# Altium PCB RFSOC_SAWG_Mezzanine.PcbDoc (part 2 of 2)
Units mm, origin at the board's own origin, x right, y up, seen from the top; angles counter-clockwise.
Board outline 64.4 x 72.39 mm, 4 copper layers (Top Layer, Layer 1, Layer 2, Bottom Layer), stack 1.429 mm thick; 92 components, 68 nets, 314 pads, 245 vias.
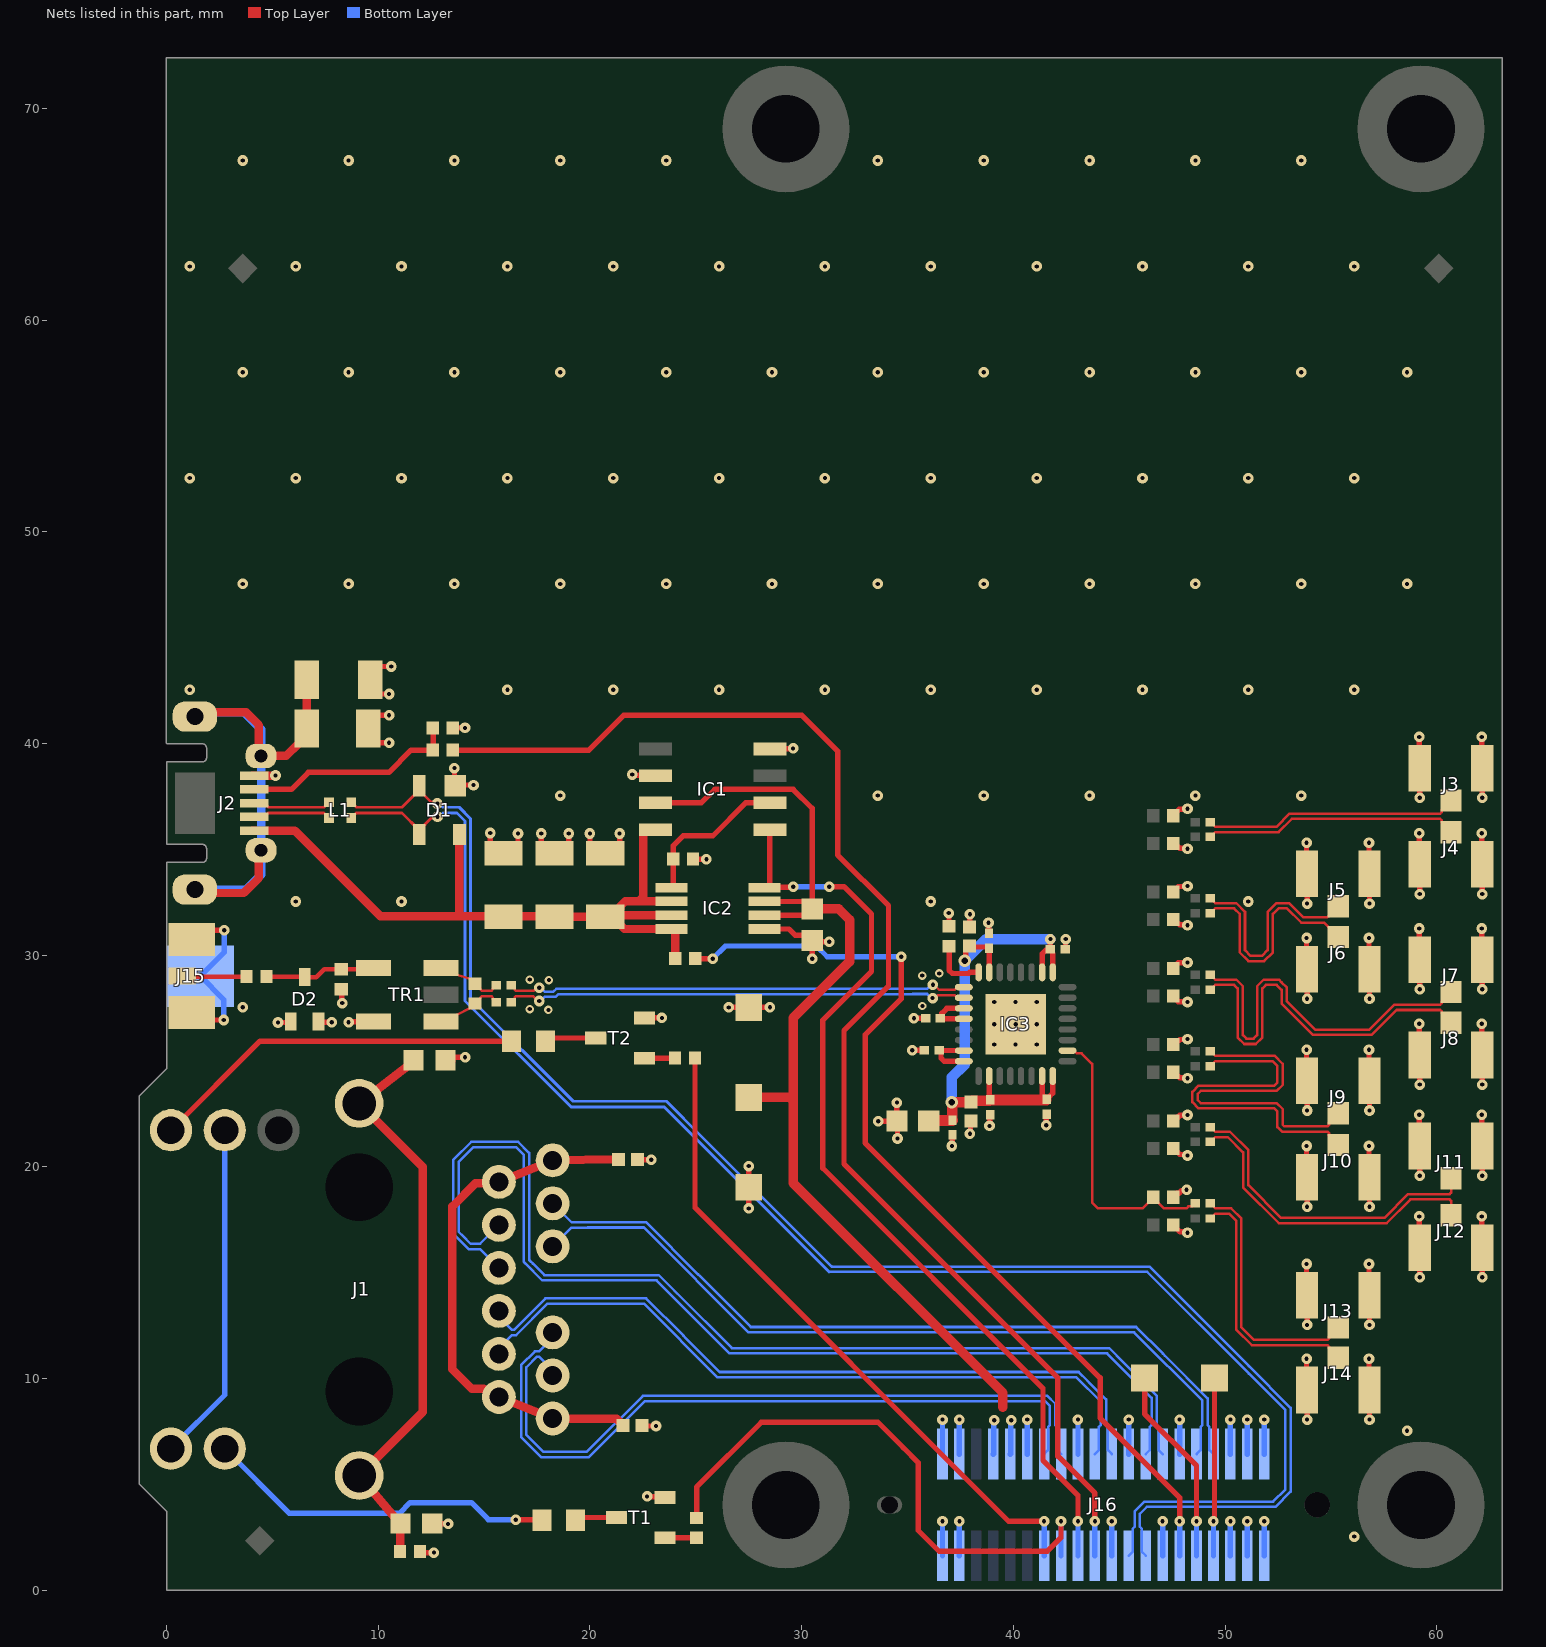
[diagram p4: the nets of this part, all layers, seen from the top]

## Via types
v1: diameter 0.5, hole 0.2, Top Layer to Bottom Layer, tented both sides, 227 vias
v2: diameter 0.4, hole 0.2, Top Layer to Bottom Layer, 9 vias
v3: diameter 0.4, hole 0.2, Top Layer to Bottom Layer, tented both sides, 7 vias
v4: diameter 0.6, hole 0.3, Top Layer to Bottom Layer, tented both sides, 2 vias

## Nets (pads, with @x,y where several pads share a name; then routed paths per layer and width w, separated by ;. In a path a pad name is that pad's centre, name@x,y a point inside that pad or via, vN(x,y) a via of type N, cw(c..) or ccw(c..) an arc to the next point about the centre after c; other vN are vias at no path point) (continued)
BUF_OUT5_P: C22.1 IC3.18 R22.1 | length 13.4
  Top Layer w0.12: IC3.18@42.56,25.488 42.87,25.488 42.995,25.363 43.229,25.363 43.725,24.867 43.725,21.085 43.725,18.31 43.999,18.036 46.104,18.036 46.402,18.334 R22.1@46.61,18.334 ; R22.1@46.61,18.562 46.61,18.542 47.116,18.036 48.17,18.036 48.269,18.135 48.462,18.135 C22.1@48.602,18.275
BUF_OUTC0_N: C11.2 J4.1 | length 12.1
  Top Layer w0.12: C11.2@49.302,35.583 49.327,35.583 49.467,35.723 49.467,35.739 49.537,35.809 52.524,35.809 53.15,36.435 60.165,36.435 60.235,36.365 60.235,36.25 J4.1@60.675,35.81
BUF_OUTC0_P: C10.2 J3.1 | length 12.1
  Top Layer w0.12: C10.2@49.302,36.285 49.327,36.285 49.467,36.145 49.467,36.129 49.537,36.059 52.421,36.059 53.046,36.685 60.165,36.685 60.235,36.755 60.235,36.87 J3.1@60.675,37.31
BUF_OUTC1_N: C14.2 J6.1 | length 10.9
  Top Layer w0.12: C14.2@49.302,31.985 49.327,31.985 49.467,32.125 49.467,32.141 49.537,32.211 50.041,32.211 50.425,32.211 50.693,31.944 50.693,30.133 51.107,29.719 51.849,29.719 52.263,30.133 52.263,31.944 52.53,32.211 52.664,32.211 52.924,32.211 53.6,31.535 54.675,31.535 54.885,31.325 54.91,31.325 55.35,30.885 J6.1@55.35,30.86
BUF_OUTC1_P: C12.2 J5.1 | length 10.8
  Top Layer w0.12: C12.2@49.302,32.687 49.327,32.687 49.467,32.547 49.467,32.532 49.537,32.461 50.041,32.461 50.529,32.461 50.943,32.047 50.943,30.236 51.21,29.969 51.745,29.969 52.013,30.236 52.013,32.047 52.427,32.461 52.664,32.461 53.027,32.461 53.704,31.785 54.745,31.785 54.825,31.785 54.885,31.845 54.91,31.845 55.35,32.285 J5.1@55.35,32.31
BUF_OUTC2_N: C16.2 J8.1 | length 18.6
  Top Layer w0.12: C16.2@49.302,28.36 49.327,28.36 49.467,28.5 49.467,28.524 49.537,28.594 50.11,28.594 50.426,28.594 50.593,28.427 50.593,26.118 50.907,25.804 51.449,25.804 51.763,26.118 51.763,28.427 51.931,28.594 52.064,28.594 52.441,28.594 52.673,28.362 52.673,27.708 54.146,26.235 56.925,26.235 58.1,27.41 59.513,27.41 60.165,27.41 60.235,27.34 60.235,27.25 J8.1@60.675,26.81
BUF_OUTC2_P: C15.2 J7.1 | length 18.6
  Top Layer w0.12: C15.2@49.302,29.079 49.327,29.079 49.467,28.939 49.467,28.915 49.537,28.844 50.11,28.844 50.529,28.844 50.843,28.531 50.843,26.221 51.011,26.054 51.346,26.054 51.513,26.221 51.513,28.531 51.827,28.844 52.064,28.844 52.544,28.844 52.677,28.712 52.923,28.465 52.923,27.812 53.112,27.623 53.2,27.535 54.25,26.485 56.821,26.485 57.996,27.66 59.409,27.66 60.165,27.66 60.235,27.73 60.235,27.82 J7.1@60.675,28.26
BUF_OUTC3_N: C18.2 J10.1 | length 17.1
  Top Layer w0.12: C18.2@49.302,24.76 49.327,24.76 49.467,24.9 49.467,24.919 49.537,24.99 52.245,24.99 52.475,24.76 52.475,24.647 52.475,23.978 52.333,23.835 48.748,23.835 48.459,23.546 48.459,23.054 48.748,22.765 52.333,22.765 52.475,22.623 52.475,22.489 52.475,21.877 52.692,21.66 54.525,21.66 54.84,21.66 54.91,21.59 54.91,21.475 J10.1@55.35,21.035
BUF_OUTC3_P: C17.2 J9.1 | length 17.1
  Top Layer w0.12: C17.2@49.302,25.469 49.327,25.469 49.467,25.329 49.467,25.31 49.537,25.24 52.349,25.24 52.725,24.864 52.725,24.647 52.725,23.874 52.436,23.585 48.851,23.585 48.709,23.443 48.709,23.158 48.851,23.015 52.436,23.015 52.725,22.726 52.725,22.489 52.725,21.98 52.795,21.91 54.421,21.91 54.84,21.91 54.91,21.98 54.91,22.095 J9.1@55.35,22.535
BUF_OUTC4_N: C21.2 J12.1 | length 15.3
  Top Layer w0.12: C21.2@49.302,21.185 49.327,21.185 49.467,21.325 49.467,21.337 49.537,21.407 50.128,21.407 50.85,20.685 50.85,19.031 52.546,17.335 57.629,17.335 58.754,18.46 60.605,18.46 60.675,18.39 J12.1@60.675,17.71
BUF_OUTC4_P: C20.2 J11.1 | length 15.3
  Top Layer w0.12: C20.2@49.302,21.88 49.327,21.88 49.467,21.74 49.467,21.728 49.537,21.657 50.231,21.657 51.1,20.789 51.1,19.135 52.65,17.585 57.525,17.585 58.65,18.71 60.605,18.71 60.675,18.78 J11.1@60.675,19.46
BUF_OUTC5_N: C23.2 J14.1 | length 12
  Top Layer w0.12: C23.2@49.302,17.56 49.327,17.56 49.467,17.7 49.467,17.722 49.537,17.793 50.189,17.793 50.525,17.456 50.525,12.31 51.263,11.573 54.84,11.573 54.91,11.502 54.91,11.425 J14.1@55.35,10.985
BUF_OUTC5_P: C22.2 J13.1 | length 12
  Top Layer w0.12: C22.2@49.302,18.275 49.327,18.275 49.467,18.135 49.467,18.113 49.537,18.043 50.292,18.043 50.775,17.56 50.775,12.414 51.366,11.823 54.84,11.823 54.91,11.893 54.91,11.97 J13.1@55.35,12.41
CLK_SEL: IC3.32 R11.2 | length 2.6
  Top Layer w0.254: R11.2@36.967,30.421 36.967,29.284 37.116,29.135 37.888,29.135 37.941,29.188 IC3.32@38.36,29.188
ETH_LED1: R3.1 T2.3 | length 2.4
  Top Layer w0.254: R3.1@17.9,25.935 18.05,26.085 T2.3@20.275,26.085
ETH_LED2: R1.1 T1.3 | length 2
  Top Layer w0.254: R1.1@19.325,3.31 19.45,3.435 T1.3@21.25,3.435
EXT_CLK0: D2.3 R24.2 R25.1 TR1.6 | length 5.2
  Top Layer w0.22: R24.2@4.72,28.985 6.5,28.985 D2.3@6.525,28.96 7.075,28.96 7.445,29.33 R25.1@8.25,29.33 9.705,29.33 TR1.6@9.775,29.4
EXT_CLK0_N: C32.2 IC3.2 | length 22
  Top Layer w0.12: C32.2@16.275,27.785 16.3,27.785 16.44,27.925 16.44,27.99 16.51,28.06 17.305,28.06 17.53,27.835 v1(17.6,27.835) ; v1(36.184,27.972) 36.287,27.972 36.428,28.113 37.055,28.113 37.225,28.113 37.35,27.988 IC3.2@37.66,27.988
  Bottom Layer w0.12: v1(17.6,27.835) 17.67,27.835 17.86,28.025 18.38,28.025 18.517,28.162 35.233,28.162 35.236,28.165 35.924,28.165 36.117,27.972 v1(36.184,27.972)
EXT_CLK0_P: C31.2 IC3.1 | length 22
  Top Layer w0.12: C31.2@16.275,28.585 16.3,28.585 16.44,28.445 16.44,28.38 16.51,28.31 17.342,28.31 17.497,28.465 v1(17.6,28.465) ; v1(36.201,28.602) 36.261,28.602 36.5,28.363 36.951,28.363 37.225,28.363 37.35,28.488 IC3.1@37.66,28.488
  Bottom Layer w0.12: v1(17.6,28.465) 17.67,28.465 17.86,28.275 18.277,28.275 18.414,28.412 35.129,28.412 35.132,28.415 35.941,28.415 36.128,28.602 v1(36.201,28.602)
EXT_CLKC0_N: C32.1 R26.2 TR1.3 | length 3.2
  Top Layer w0.12: TR1.3@12.955,26.86 13.72,27.18 14.325,27.485 R26.2@14.575,27.715 14.595,27.715 14.825,27.945 14.825,27.99 14.895,28.06 15.067,28.06 15.34,28.06 15.41,27.99 15.41,27.925 15.55,27.785 C32.1@15.575,27.785
EXT_CLKC0_P: C31.1 R26.1 TR1.1 | length 3.1
  Top Layer w0.12: TR1.1@12.955,29.4 13.72,29.08 14.325,28.885 R26.1@14.575,28.655 14.595,28.655 14.825,28.425 14.825,28.38 14.895,28.31 15.17,28.31 15.34,28.31 15.41,28.38 15.41,28.445 15.55,28.585 C31.1@15.575,28.585
FGND: C5.1 J2.6 R7.1 | length 28.8
  Top Layer w0.4: J2.6@1.24,33.094 1.399,32.935 3.65,32.935 4.365,33.65 J2.6@4.365,34.956 ; J2.6@1.24,41.269 1.441,41.469 3.766,41.469 4.365,40.87 4.365,39.595 J2.6@4.365,39.406 ; J2.6@4.368,39.409 5.649,39.409 6.25,40.01 6.625,40.385 C5.1@6.625,43.01
  Bottom Layer w0.4: J2.6@1.34,33.094 3.759,33.094 4.465,33.8 J2.6@4.465,34.956 J2.6@4.465,39.406 4.465,40.67 3.67,41.465 1.537,41.465 J2.6@1.34,41.269
GND: C1.2 C2.2 C3.1 C4.2 C5.2 C6.2 C7.2 C8.1 C9.1 C13.1 C19.1 C24.1 C25.1 C26.1 C27.1 C28.1 C29.1 C30.1 D1.1 D2.1 D2.2 IC1.4 IC1.6 IC2.1 IC3.33 J2.5 J3.2 J4.2 J5.2 J6.2 J7.2 J8.2 J9.2 J10.2 J11.2 J12.2 J13.2 J14.2 J15.2 J16.12 J16.13 J16.18 J16.19 J16.24 J16.30 J16.37 J16.38 J16.39 J16.40 R2.1 R7.2 R9.1 R11.1 R12.2 R13.2 R14.2 R15.2 R16.2 R17.2 R18.2 R19.2 R20.2 R21.2 R22.2 R23.2 R25.2 T1.2 T2.2 TP5.1 TR1.4 | length 135.7
  Top Layer w0.254: J15.2@1.196,27.284 1.545,26.935 v1(2.7,26.935) ; J15.2@1.196,30.734 1.637,31.175 v1(2.721,31.175) ; v1(5.266,26.82) 5.835,26.82 D2.1@5.875,26.86 ; D2.2@7.175,26.86 7.2,26.835 v1(7.8,26.835) ; R25.2@8.25,28.39 8.275,28.365 8.275,27.76 v1(8.3,27.735) ; v1(8.6,26.835) 8.613,26.848 9.763,26.848 TR1.4@9.775,26.86 ; R7.2@10,40.035 v1(10.512,40.035) ; R7.2@10,41.335 v1(10.512,41.335) ; C5.2@10,42.335 v1(10.512,42.335) ; C5.2@10.1,43.635 v1(10.612,43.635) ; R2.1@11.97,1.835 12.133,1.779 v1(12.631,1.779) ; C2.2@12.55,3.16 12.898,3.135 v1(13.3,3.135) ; C4.2@13.171,25.037 13.519,24.996 13.519,25.178 v1(14.102,25.178) ; R9.1@13.52,40.735 v1(14.1,40.735) ; v1(13.6,38.835) 13.6,38.035 D1.1@13.634,38.001 13.669,38.035 v1(14.5,38.035) ; v1(15.292,35.77) 15.292,35.258 15.74,34.81 C9.1@15.925,34.81 ; C9.1@16.6,35.235 v1(16.6,35.747) ; C7.2@17.7,35.235 v1(17.7,35.747) ; C7.2@19,35.235 v1(19,35.747) ; C8.1@20,35.135 v1@20,35.647 ; C8.1@21.4,35.135 v1@21.4,35.647 ; v1(22,38.535) 22.033,38.503 23.068,38.503 IC1.6@23.1,38.47 ; C3.1@22.242,20.346 22.425,20.335 v1(22.9,20.335) ; C1.2@22.465,7.791 22.648,7.757 v1(23.122,7.757) ; T2.2@22.575,27.035 v1(23.4,27.035) ; v1(22.7,4.435) 22.725,4.41 23.525,4.41 T1.2@23.55,4.385 ; v1(26.552,27.532) 27.497,27.532 TP5.1@27.5,27.535 v1(28.5,27.535) ; IC2.1@28.25,31.235 29.4,31.235 29.7,30.935 30.25,30.935 C6.2@30.5,30.685 ; IC1.4@28.5,39.74 28.513,39.753 29.584,39.753 v1(29.597,39.766) ; v1(30.5,29.835) C6.2@30.5,30.685 ; v1(31.3,30.635) 30.55,30.635 C6.2@30.5,30.685 ; v1(35.225,25.51) C19.1@35.8,25.51 ; v1(35.302,27.021) C13.1@35.852,27.021 ; v1(36.95,31.985) 36.959,31.976 36.959,31.37 R11.1@36.967,31.361 ; v1(37.1,20.985) 37.113,20.998 37.113,21.498 C25.1@37.125,21.51 ; C24.1@37.925,31.335 37.938,31.348 37.938,31.923 v1(37.95,31.935) ; v1(37.95,21.56) 37.975,21.585 37.975,22.135 C30.1@38,22.16 ; v1(38.825,31.535) 38.838,31.523 38.838,31.048 C26.1@38.85,31.035 ; v1(38.875,21.935) 38.888,21.948 38.888,22.448 C27.1@38.9,22.46 ; v1(41.55,21.96) 41.563,21.973 41.563,22.473 C28.1@41.575,22.485 ; C29.1@42.45,30.285 42.463,30.298 42.463,30.748 v1(42.475,30.76) ; R23.2@47.55,17.26 47.55,17.24 47.713,17.077 47.733,17.077 47.878,16.932 48.153,16.932 v1@48.2,16.885 ; R22.2@47.55,18.562 47.55,18.582 47.713,18.745 47.818,18.745 47.945,18.873 48.135,18.873 v1(48.182,18.92) ; R21.2@47.55,20.865 47.55,20.845 47.713,20.682 47.762,20.682 47.862,20.582 48.128,20.582 v1@48.175,20.535 ; R20.2@47.55,22.167 47.55,22.187 47.713,22.35 47.783,22.35 47.862,22.429 48.204,22.429 v1(48.225,22.45) ; R19.2@47.55,24.469 47.55,24.449 47.713,24.286 47.782,24.286 47.862,24.206 48.204,24.206 v1(48.225,24.185) ; R18.2@47.55,25.771 47.55,25.791 47.713,25.954 47.802,25.954 47.862,26.014 48.204,26.014 v1(48.225,26.035) ; R17.2@47.55,28.074 47.55,28.054 47.797,27.806 48.229,27.806 v1@48.25,27.785 ; R16.2@47.55,29.376 47.55,29.396 47.787,29.633 48.23,29.633 v1@48.251,29.654 ; R15.2@47.55,31.678 47.55,31.658 47.713,31.495 47.802,31.495 47.862,31.435 48.204,31.435 v1(48.225,31.414) ; R14.2@47.55,32.98 47.55,33 47.792,33.243 48.237,33.243 v1@48.258,33.264 ; R13.2@47.55,35.283 47.55,35.263 47.713,35.1 47.807,35.1 47.862,35.045 48.233,35.045 v1@48.254,35.024 ; R12.2@47.55,36.585 47.55,36.605 47.834,36.889 48.212,36.889 v1@48.233,36.91 ; v1(53.85,10.935) 53.85,9.485 J14.2@53.875,9.46 v1(53.875,8.06) ; v1(53.85,15.41) 53.85,13.96 J13.2@53.875,13.935 v1(53.875,12.535) ; v1(53.85,20.985) 53.85,19.535 J10.2@53.875,19.51 v1(53.875,18.11) ; v1(53.85,25.535) 53.85,24.085 J9.2@53.875,24.06 v1(53.875,22.66) ; v1(53.85,30.81) 53.85,29.36 J6.2@53.875,29.335 v1(53.875,27.935) ; v1(53.85,35.31) 53.85,33.86 J5.2@53.875,33.835 v1(53.875,32.435) ; v1(56.8,10.935) 56.8,9.485 J14.2@56.825,9.46 v1(56.825,8.06) ; v1(56.8,15.41) 56.8,13.96 J13.2@56.825,13.935 v1(56.825,12.535) ; v1(56.8,20.985) 56.8,19.535 J10.2@56.825,19.51 v1(56.825,18.11) ; v1(56.8,25.535) 56.8,24.085 J9.2@56.825,24.06 v1(56.825,22.66) ; v1(56.8,30.81) 56.8,29.36 J6.2@56.825,29.335 v1(56.825,27.935) ; v1(56.8,35.31) 56.8,33.86 J5.2@56.825,33.835 v1(56.825,32.435) ; v1(59.175,17.66) 59.175,16.21 J12.2@59.2,16.185 v1(59.2,14.785) ; v1(59.175,22.46) 59.175,21.01 J11.2@59.2,20.985 v1(59.2,19.585) ; v1(59.175,26.76) 59.175,25.31 J8.2@59.2,25.285 v1(59.2,23.885) ; v1(59.175,31.26) 59.175,29.81 J7.2@59.2,29.785 v1(59.2,28.385) ; v1(59.175,35.76) 59.175,34.31 J4.2@59.2,34.285 v1(59.2,32.885) ; v1(59.175,40.31) 59.175,38.86 J3.2@59.2,38.835 v1(59.2,37.435) ; v1(62.125,17.66) 62.125,16.21 J12.2@62.15,16.185 v1(62.15,14.785) ; v1(62.125,22.46) 62.125,21.01 J11.2@62.15,20.985 v1(62.15,19.585) ; v1(62.125,26.76) 62.125,25.31 J8.2@62.15,25.285 v1(62.15,23.885) ; v1(62.125,31.26) 62.125,29.81 J7.2@62.15,29.785 v1(62.15,28.385) ; v1(62.125,35.76) 62.125,34.31 J4.2@62.15,34.285 v1(62.15,32.885) ; v1(62.125,40.31) 62.125,38.86 J3.2@62.15,38.835 v1(62.15,37.435)
  Top Layer w0.4: J2.5@4.04,38.481 5.14,38.481 v1(5.146,38.487)
  Bottom Layer w0.254: v1(2.7,26.935) 2.7,27.905 J15.2@1.596,29.009 2.721,30.134 v1(2.721,31.175) ; J16.39@36.652,1.633 v1@36.652,3.259 ; J16.40@36.652,6.433 v1(36.652,8.06) ; J16.37@37.452,1.633 v1@37.452,3.259 ; J16.38@37.452,6.433 v1(37.452,8.06) ; J16.30@40.652,6.433 v1(40.652,8.06) ; J16.24@43.052,6.433 v1(43.052,8.06) ; J16.19@44.653,1.632 v1@44.652,3.259 ; J16.18@45.452,6.433 v1(45.452,8.06) ; J16.13@47.053,1.632 v1@47.052,3.259 ; J16.12@47.852,6.433 v1(47.852,8.06)
  other v1: 56.1,2.535 36.652,3.26 37.452,3.26 44.652,3.26 47.052,3.26 58.6,7.535 48.225,16.885 48.225,20.535 3.6,27.535 48.225,27.785 48.225,29.654 6.1,32.535 11.1,32.535 36.1,32.535 51.1,32.535 48.225,33.264 48.225,35.024 20,35.747 21.4,35.747 48.225,36.91 18.6,37.535 33.6,37.535 38.6,37.535 43.6,37.535 48.6,37.535 53.6,37.535 1.1,42.535 16.1,42.535 21.1,42.535 26.1,42.535 31.1,42.535 36.1,42.535 41.1,42.535 46.1,42.535 51.1,42.535 56.1,42.535 3.6,47.535 8.6,47.535 13.6,47.535 18.6,47.535 23.6,47.535 28.6,47.535 33.6,47.535 38.6,47.535 43.6,47.535 48.6,47.535 53.6,47.535 58.6,47.535 1.1,52.535 6.1,52.535 11.1,52.535 16.1,52.535 21.1,52.535 26.1,52.535 31.1,52.535 36.1,52.535 41.1,52.535 46.1,52.535 51.1,52.535 56.1,52.535 3.6,57.535 8.6,57.535 13.6,57.535 18.6,57.535 23.6,57.535 28.6,57.535 33.6,57.535 38.6,57.535 43.6,57.535 48.6,57.535 53.6,57.535 58.6,57.535 1.1,62.535 6.1,62.535 11.1,62.535 16.1,62.535 21.1,62.535 26.1,62.535 31.1,62.535 36.1,62.535 41.1,62.535 46.1,62.535 51.1,62.535 56.1,62.535 3.6,67.535 8.6,67.535 13.6,67.535 18.6,67.535 23.6,67.535 33.6,67.535 38.6,67.535 43.6,67.535 48.6,67.535 53.6,67.535
  other v2: 39.1,25.785 40.1,25.785 41.1,25.785 39.1,26.738 40.11,26.738 41.1,26.738 39.1,27.785 40.1,27.785 41.1,27.785
  other v3: 18.037,27.411 17.152,27.454 35.705,27.598 18.06,28.825 17.152,28.845 35.7,29.035 36.5,29.135
NetC1_1: C1.1 C3.2 J1.1 J1.6 J1.7 J1.12 | length 25.2
  Top Layer w0.4: J1.7@18.24,8.114 J1.1@15.7,9.13 15.375,9.13 14.983,9.522 14.413,9.522 13.5,10.435 13.5,18.135 14.588,19.223 15.633,19.223 J1.6@15.7,19.29 J1.12@18.24,20.306 21.24,20.35 C3.2@21.35,20.46 ; J1.7@18.264,8.09 21.266,8.09 C1.1@21.565,7.791
NetC2_1: C2.1 C4.1 J1.18 J1.19 R2.2 | length 27.7
  Top Layer w0.4: R2.2@11.03,1.835 11.032,1.945 11.032,2.885 C2.1@11.05,3.16 10.775,3.435 J1.18@9.1,5.42 12.1,8.42 12.1,20 J1.19@9.1,23 11.396,24.762 C4.1@11.671,25.037
NetC13_2: C13.2 IC3.3 IC3.4 | length 2.4
  Top Layer w0.254: C13.2@36.552,27.021 36.623,27.021 36.623,27.015 36.65,26.988 IC3.4@37.66,26.988 ; C13.2@36.623,27.137 36.623,27.253 36.858,27.488 IC3.3@37.66,27.488
NetC19_2: C19.2 IC3.7 IC3.8 | length 2.7
  Top Layer w0.254: C19.2@36.5,25.51 36.51,25.51 36.583,25.437 36.583,25.137 36.731,24.988 IC3.8@37.66,24.988 ; C19.2@36.538,25.497 37.651,25.497 IC3.7@37.66,25.488
NetJ1_13: J1.13 R1.2 | length 16.8
  Top Layer w0.254: v1(16.5,3.335) 17.7,3.335 R1.2@17.725,3.31
  Bottom Layer w0.254: J1.13@2.75,6.69 5.805,3.635 11,3.635 11.5,4.135 14.4,4.135 15.2,3.335 v1(16.5,3.335)
NetJ1_17: J1.17 R3.2 | length 17.9
  Top Layer w0.254: J1.17@0.21,21.73 4.415,25.935 15.977,25.935 R3.2@16.3,26.135
NetJ2_4: J2.4 R8.1 R9.2 | length 10.4
  Top Layer w0.254: J2.4@4.04,37.831 5.896,37.831 6.7,38.635 10.5,38.635 11.55,39.685 R8.1@12.58,39.685 12.605,39.71 12.605,40.71 R9.2@12.63,40.735
NetJ15_1: J15.1 R24.1 | length 3
  Top Layer w0.22: J15.1@0.746,29.009 0.77,28.985 R24.1@3.78,28.985
NetR4_2: R4.2 T1.1 | length 1.5
  Top Layer w0.254: T1.1@23.55,2.485 23.563,2.473 25.063,2.473 R4.2@25.075,2.46
NetR5_2: R5.2 T2.1 | length 1.5
  Top Layer w0.254: T2.1@22.575,25.135 23.904,25.135 cw(c23.904,24.964) R5.2@24.025,25.085
P3V3: J1.14 J1.16 J16.1 J16.2 J16.3 J16.4 J16.5 J16.6 L2.2 R10.1 TP3.1 | length 31.1
  Top Layer w0.254: R10.1@24.87,34.535 v1(25.5,34.535) ; v1(27.5,18.035) v1(27.5,20.035) ; v1(33.621,22.156) 34.496,22.156 L2.2@34.5,22.16 ; v1(34.5,23.035) L2.2@34.5,22.16 ; v1(34.526,21.339) 34.526,22.134 L2.2@34.5,22.16
  Bottom Layer w0.254: J1.14@0.21,6.69 2.75,9.23 J1.16@2.75,21.73 ; J16.5@50.253,1.632 v1@50.252,3.259 ; J16.6@50.252,6.433 v1(50.252,8.06) ; J16.3@51.053,1.632 v1@51.052,3.259 ; J16.4@51.052,6.433 v1@51.052,8.059 ; J16.1@51.853,1.632 v1@51.852,3.259 ; J16.2@51.852,6.433 v1@51.852,8.059
  other v1: 50.252,3.26 51.052,3.26 51.852,3.26 51.052,8.06 51.852,8.06
P3V3_ADCLK: C24.2 C25.2 C26.2 C27.2 C28.2 C29.2 C30.2 IC3.10 IC3.15 IC3.16 IC3.25 IC3.26 IC3.31 L2.1 | length 27.3
  Top Layer w0.254: v4(37.7,29.735) 37.747,29.782 37.747,30.257 C24.2@37.925,30.435 37.975,30.385 38.8,30.385 C26.2@38.85,30.335 38.855,30.33 38.855,29.193 IC3.31@38.86,29.188 ; IC3.10@38.86,24.288 38.869,24.279 38.869,23.191 C27.2@38.9,23.16 ; IC3.15@41.36,24.288 41.36,23.425 C28.2@41.575,23.21 ; IC3.26@41.36,29.188 41.36,30.063 41.533,30.236 41.652,30.236 41.701,30.285 C29.2@41.75,30.285 ; C28.2@41.575,23.185 C28.2@41.575,23.21 ; v1(41.75,30.76) C29.2@41.75,30.285 ; IC3.16@41.86,24.288 41.86,23.482 41.661,23.283 41.648,23.283 C28.2@41.575,23.21 ; IC3.25@41.86,29.188 41.86,30.063 41.848,30.075 41.848,30.212 41.775,30.285 C29.2@41.75,30.285
  Top Layer w0.5: L2.1@36.029,22.189 C25.2@37.104,22.189 ; C25.2@37.125,22.21 37.113,22.222 37.113,23.032 v4(37.094,23.052) 37.098,23.056 37.996,23.056 C30.2@38,23.06 38.06,23.12 38.86,23.12 C27.2@38.9,23.16 ; C27.2@38.901,23.159 C28.2@41.549,23.159
  Bottom Layer w0.5: v4(37.094,23.052) 37.094,24.229 37.7,24.835 v4(37.7,29.735) 38.725,30.76 v1(41.75,30.76)
P5V0: C6.1 IC1.7 IC2.2 IC2.3 J16.32 J16.34 TP4.1 | length 53.2
  Top Layer w0.254: IC1.7@23.1,37.2 25.265,37.2 25.9,37.835 29.6,37.835 30.5,36.935 C6.1@30.5,32.185 ; IC2.2@28.25,31.885 30.2,31.885 C6.1@30.5,32.185 ; IC2.3@28.25,32.535 30.15,32.535 C6.1@30.5,32.185
  Top Layer w0.45: TP4.1@27.5,23.285 29.45,23.285 29.6,23.135 ; C6.1@30.5,32.185 31.75,32.185 32.263,31.672 32.263,29.698 29.6,27.035 29.6,23.135 ; 39.5,8.642 39.5,9.335 29.6,19.235 29.6,23.135
  Bottom Layer w0.254: J16.34@39.053,6.432 39.077,6.456 39.077,8.012 v1(39.1,8.035) ; J16.32@39.853,6.432 39.877,6.456 39.877,8.012 v1(39.9,8.035)
PHY_LED0: J16.25 R4.1 | length 27
  Top Layer w0.254: R4.1@25.038,3.417 25.038,4.873 28.1,7.935 33.6,7.935 34.8,6.735 35.5,6.035 35.5,2.835 36.5,1.835 41.6,1.835 42.252,2.487 v1(42.252,3.26) v1@42.244,3.268
  Bottom Layer w0.254: J16.25@42.253,1.632 v1@42.252,3.259
PHY_LED1: J16.27 R5.1 | length 31.3
  Top Layer w0.254: R5.1@24.961,25.14 24.961,18.074 39.775,3.26 v1(41.452,3.26)
  Bottom Layer w0.254: J16.27@41.452,1.633 v1@41.452,3.259
PHY_MDI0_N: J1.10 J16.10 | length 37.1
  Bottom Layer w0.12: J1.10@18.24,16.242 19.131,17.133 19.898,17.133 19.9,17.135 22.546,17.135 27.496,12.185 45.7,12.185 48.928,8.957 48.928,7.801 48.843,7.716 48.843,6.622 J16.10@48.653,6.432
PHY_MDI0_P: J1.11 J16.8 | length 37.5
  Bottom Layer w0.12: J1.11@18.24,18.274 19.131,17.383 19.794,17.383 19.796,17.385 22.65,17.385 25.112,14.923 25.2,14.835 27.6,12.435 45.804,12.435 47.063,11.175 47.152,11.087 49.178,9.061 49.178,7.801 49.263,7.716 49.263,6.622 J16.8@49.453,6.432
PHY_MDI1_N: J1.5 J16.16 | length 49.5
  Bottom Layer w0.12: J1.5@15.7,17.258 14.809,16.367 14.368,16.367 14,16.735 13.8,16.935 13.8,20.235 14.5,20.935 16.5,20.935 16.875,20.56 16.875,15.507 16.923,15.458 17.746,14.635 23.146,14.635 26.596,11.185 44.425,11.185 46.528,9.082 46.528,7.801 46.443,7.716 46.443,6.622 J16.16@46.253,6.432
PHY_MDI1_P: J1.4 J16.14 | length 50.7
  Bottom Layer w0.12: J1.4@15.7,15.226 14.809,16.117 14.264,16.117 13.912,16.47 13.55,16.831 13.55,20.339 14.396,21.185 16.604,21.185 17.125,20.664 17.125,20.457 17.125,15.61 17.173,15.562 17.3,15.435 17.85,14.885 23.25,14.885 24.012,14.123 24.1,14.035 26.7,11.435 44.529,11.435 45.213,10.75 45.302,10.662 46.778,9.186 46.778,7.801 46.863,7.716 46.863,6.622 J16.14@47.053,6.432
PHY_MDI2_N: J1.2 J16.22 | length 34.1
  Bottom Layer w0.12: J1.2@15.7,11.162 15.7,11.438 16.315,12.053 16.518,12.053 18,13.535 22.546,13.535 26.021,10.06 42.975,10.06 44.128,8.907 44.128,7.801 44.043,7.716 44.043,6.622 J16.22@43.853,6.432
PHY_MDI2_P: J1.3 J16.20 | length 34.5
  Bottom Layer w0.12: J1.3@15.7,13.194 15.7,12.918 16.315,12.303 16.414,12.303 17.896,13.785 22.65,13.785 24.412,12.023 24.5,11.935 26.125,10.31 43.079,10.31 43.513,9.875 43.602,9.787 44.378,9.011 44.378,7.801 44.463,7.716 44.463,6.622 J16.20@44.653,6.432
PHY_MDI3_N: J1.9 J16.28 | length 34.6
  Bottom Layer w0.12: J1.9@18.24,12.178 18.24,11.926 17.601,11.287 17.398,11.287 16.75,10.639 16.75,7.231 17.135,6.847 17.696,6.285 19.95,6.285 22.6,8.935 41.5,8.935 41.728,8.707 41.728,7.801 41.643,7.716 41.643,6.622 J16.28@41.453,6.432
PHY_MDI3_P: J1.8 J16.26 | length 34.2
  Bottom Layer w0.12: J1.8@18.24,10.146 18.24,10.398 17.601,11.037 17.502,11.037 17,10.535 17,7.335 17.4,6.935 17.8,6.535 19.846,6.535 22.496,9.185 41.604,9.185 41.978,8.811 41.978,7.801 42.063,7.716 42.063,6.622 J16.26@42.253,6.432
QSFP0_SCL: J16.7 TP1.1 | length 8.4
  Top Layer w0.254: v1(49.452,3.26) 49.452,3.327 49.5,3.375 TP1.1@49.5,10.035
  Bottom Layer w0.254: J16.7@49.453,1.632 v1@49.452,3.259
QSFP0_SDA: J16.9 TP2.1 | length 9.4
  Top Layer w0.254: TP2.1@46.2,10.035 46.2,8.335 48.652,5.884 v1(48.652,3.26)
  Bottom Layer w0.254: J16.9@48.653,1.632 v1@48.652,3.259
USB0_CPEN: IC1.1 IC2.4 J16.23 | length 44.6
  Top Layer w0.254: IC2.4@28.25,33.185 28.275,33.21 IC2.4@28.427,33.21 ; IC1.1@28.5,35.93 28.5,33.283 IC2.4@28.427,33.21 ; v1(29.6,33.235) 29.575,33.21 IC2.4@28.427,33.21 ; v1(31.3,33.235) 32,33.235 33.3,31.935 33.3,29.235 31,26.935 31,19.935 41.4,9.535 41.4,6.135 43.052,4.484 v1(43.052,3.26)
  Bottom Layer w0.254: v1(29.6,33.235) v1(31.3,33.235) ; J16.23@43.053,1.632 v1@43.052,3.259
USB0_D_N: D1.3 J16.17 L1.1 | length 75.3
  Top Layer w0.135: L1.1@8.725,36.478 8.964,36.718 11.117,36.718 D1.3@11.934,35.901 ; D1.3@11.934,35.701 D1.3@11.934,35.901 ; v1(12.8,36.535) 12.731,36.466 12.499,36.466 11.957,35.923 11.934,35.923 D1.3@11.934,35.901
  Bottom Layer w0.12: 31.3,15.035 46.325,15.035 51.125,10.235 52.85,8.51 52.85,4.76 52.275,4.185 46.196,4.185 45.728,3.717 45.728,3.001 45.643,2.916 45.643,1.822 J16.17@45.453,1.632
  Bottom Layer w0.135: v1(12.8,36.535) 12.878,36.535 13.062,36.719 13.716,36.719 14.1,36.335 14.1,27.835 19.1,22.835 23.5,22.835 25.035,21.3 31.3,15.035
USB0_D_P: D1.2 J16.15 L1.4 | length 75.7
  Top Layer w0.135: L1.4@8.725,37.228 8.97,36.983 11.117,36.983 D1.2@11.934,37.801 ; D1.2@11.934,38.001 D1.2@11.934,37.801 ; v1(12.795,37.165) 12.726,37.234 12.494,37.234 12.167,37.562 12.167,37.568 D1.2@11.934,37.801
  Bottom Layer w0.12: 31.425,15.293 31.433,15.285 46.429,15.285 51.125,10.589 53.1,8.614 53.1,4.656 52.379,3.935 46.3,3.935 45.978,3.613 45.978,3.001 46.063,2.916 46.063,1.822 J16.15@46.253,1.632
  Bottom Layer w0.135: v1(12.795,37.165) 12.876,37.165 13.057,36.984 13.826,36.984 14.365,36.445 14.365,27.945 19.21,23.1 23.61,23.1 25.3,21.41 31.417,15.293 31.425,15.293
USB0_ID: J16.21 R8.2 | length 64.3
  Top Layer w0.254: R8.2@13.52,39.685 13.522,39.687 19.952,39.687 21.6,41.335 30,41.335 31.7,39.635 31.7,34.735 34.1,32.335 34.1,28.535 32,26.435 32,20.135 42.1,10.035 42.1,6.335 43.852,4.584 v1(43.852,3.26)
  Bottom Layer w0.254: J16.21@43.853,1.632 v1@43.852,3.259
USB0_VBUS: J16.11 R6.2 | length 45.4
  Top Layer w0.254: R6.2@24.97,29.835 v1(25.8,29.835) ; v1(34.709,29.925) 34.709,27.944 33,26.235 33,21.135 44.1,10.035 44.1,8.135 47.852,4.384 v1(47.852,3.26)
  Bottom Layer w0.254: v1(25.8,29.835) 26.4,30.435 30.7,30.435 31.21,29.925 v1(34.709,29.925) ; J16.11@47.853,1.632 v1@47.852,3.259
USB_5V: C7.1 C8.2 C9.2 D1.4 IC1.8 IC2.6 IC2.7 IC2.8 J2.1 R6.1 | length 37.1
  Top Layer w0.4: J2.1@4.04,35.881 6.054,35.881 10.1,31.835 13.7,31.835 ; D1.4@13.834,35.701 13.834,31.969 13.7,31.835 ; C7.1@18.325,31.81 C8.2@20.725,31.81 C8.2@21.05,31.81 ; C7.1@18.325,31.835 15.925,31.835 13.7,31.835 ; IC1.8@23.1,35.93 22.625,35.93 22.525,35.83 22.525,32.76 22.3,32.535 ; IC2.7@23.85,31.885 C8.2@21.125,31.885 ; IC2.6@23.85,32.535 22.3,32.535 ; R6.1@24.03,29.835 24.03,31.21 24.005,31.235 IC2.8@23.85,31.235 21.625,31.235 C8.2@21.05,31.81 ; C8.2@21.05,31.81 C8.2@21.125,31.885 ; C8.2@21.125,31.885 21.425,32.185 21.425,32.301 21.659,32.535 22.3,32.535
USB_N: J2.2 L1.2 | length 3.7
  Top Layer w0.135: J2.2@4.14,36.531 4.615,36.531 4.804,36.72 7.432,36.72 L1.2@7.675,36.478
USB_P: J2.3 L1.3 | length 3.7
  Top Layer w0.135: J2.3@4.14,37.181 4.615,37.181 4.81,36.986 7.432,36.986 L1.3@7.675,37.228
USBH_OC1: IC1.2 IC2.5 R10.2 | length 7.4
  Top Layer w0.254: IC2.5@23.85,33.185 23.93,33.265 R10.2@23.93,34.535 23.93,35.165 24.4,35.635 25.8,35.635 27.365,37.2 IC1.2@28.5,37.2
pads on no net: FTG1.1 FTG2.1 FTG3.1 IC1.3 IC1.5 IC3.5 IC3.6 IC3.9 IC3.11 IC3.12 IC3.13 IC3.14 J1.15 J1.20 J1.21 J2.PastePad J16.29 J16.31 J16.33 J16.35 J16.36 J16.M1 J16.M2 TR1.2

## Polygon pours and split planes (outlines as drawn)
GND on Layer 1 "GND_L02_P006" (solid, pour order 6): 63.095,0 63.095,72.39 -0.024,72.39 0,72.366 0,0
P3V3 on Layer 1 "Layer 1-P3V3" (solid, remove dead copper, pour order 5): 0,3.735 0,0 49.572,0 53.773,0 53.773,7.162 51.7,9.235 50.5,9.235 30,29.735 30,33.735 28.2,35.535 24.7,35.535 24.189,35.024 24.189,30.146 18.674,24.631 -0.005,24.631 -1.3,23.335 -1.3,5.035
GND on Layer 2 "GND_L03_P007" (solid, pour order 7): 63.095,0 0,0 0,3.735 -1.3,5.035 -1.3,23.335 -0.024,24.611 -0.024,72.39 63.095,72.39

## Keep-outs
Keep-Out Layer:
  lines w0.2: 63.095,72.39 -0.024,72.39 0.015,72.351 0.015,24.65 -1.3,23.335 -1.3,5.035 0,3.735 0,0 63.095,0 63.095,72.39 ; 63.095,72.39 63.095,72.39

## Other copper
Top Layer:
  rectangle net P5V0: 38.7,7.735 40.2,8.635
Bottom Layer:
  rectangle net GND: 38.4,24.935 41.9,28.735

## Silkscreen, mask and mechanical layers (free items; w line width, h text height)
Top Overlay:
  drawing of 1236 lines, arcs and shapes, not listed
  text "RFSoC SAWG  Mezzanine v1.0" at 5.9,51.835 h2
  text "N" at 59.623,36.961 h0.7 r90
  text "P" at 59.623,35.794 h0.7 r90
  text "OUT 0" at 58.467,34.293 h0.9 r90
  text "N" at 54.193,31.92 h0.7 r90
  text "P" at 54.193,30.753 h0.7 r90
  text "OUT 1" at 53.084,29.296 h0.9 r90
  text "N" at 59.605,27.896 h0.7 r90
  text "GND" at 29.058,27.102 h1
  text "P" at 59.605,26.73 h0.7 r90
  text "OUT 2" at 58.467,25.272 h0.9 r90
  text "P5V0" at 29.058,22.73 h1
  text "N" at 54.177,22.075 h0.7 r90
  text "P" at 54.177,20.908 h0.7 r90
  text "OUT 3" at 53.067,19.451 h0.9 r90
  text "N" at 59.576,18.941 h0.7 r90
  text "P3V3" at 29.058,18.282 h1
  text "P" at 59.576,17.774 h0.7 r90
  text "OUT 4" at 58.467,16.316 h0.9 r90
  text "N" at 54.174,12.021 h0.7 r90
  text "SDA" at 46.7,11.435 h1 r90
  text "SCL" at 50,11.435 h1 r90
  text "P" at 54.174,10.854 h0.7 r90
  text "OUT 5" at 53.065,9.396 h0.9 r90
Mechanical 1:
  lines w0.1: 0.015,34.381 0.015,26.249 0.015,24.65 -0.024,24.611 -1.3,23.335 -1.3,5.035 0,3.735 0,1.035 0,0 63.095,0 63.095,72.39 -0.024,72.39 -0.024,54.299 -0.024,40.02 0.015,39.981 ; 0.015,35.231 0.015,39.131
Mechanical 2:
  lines w0.127: -3.805,-22.875 -3.805,106.953 ; 29.253,5.032 29.253,78.032 ; 59.253,4.032 59.253,77.032

## Text inside footprints (layer, text, board x,y; h text height)
J2: Mechanical 8 "PCB end" at -0.935,41.481 h0.5 r270; Drill Drawing "r0.2" at 2.84,34.881 h1 r270; Drill Drawing "1.87" at -0.171,37.54 h1; Drill Drawing "0.85" at -2.776,38.683 h1 r270
J15: Mechanical 8 "PCB EDGE" at -0.454,25.609 h1.02 r90
J16: Bottom Overlay "1" at 52.053,-0.918 h1.02; Bottom Overlay "2" at 52.203,7.982 h1.02; Bottom Overlay "40" at 37.503,7.982 h1.02; Bottom Overlay "39" at 37.453,-0.918 h1.02